# EAGLE board Schematic-1 (EAGLE 8.2.1)
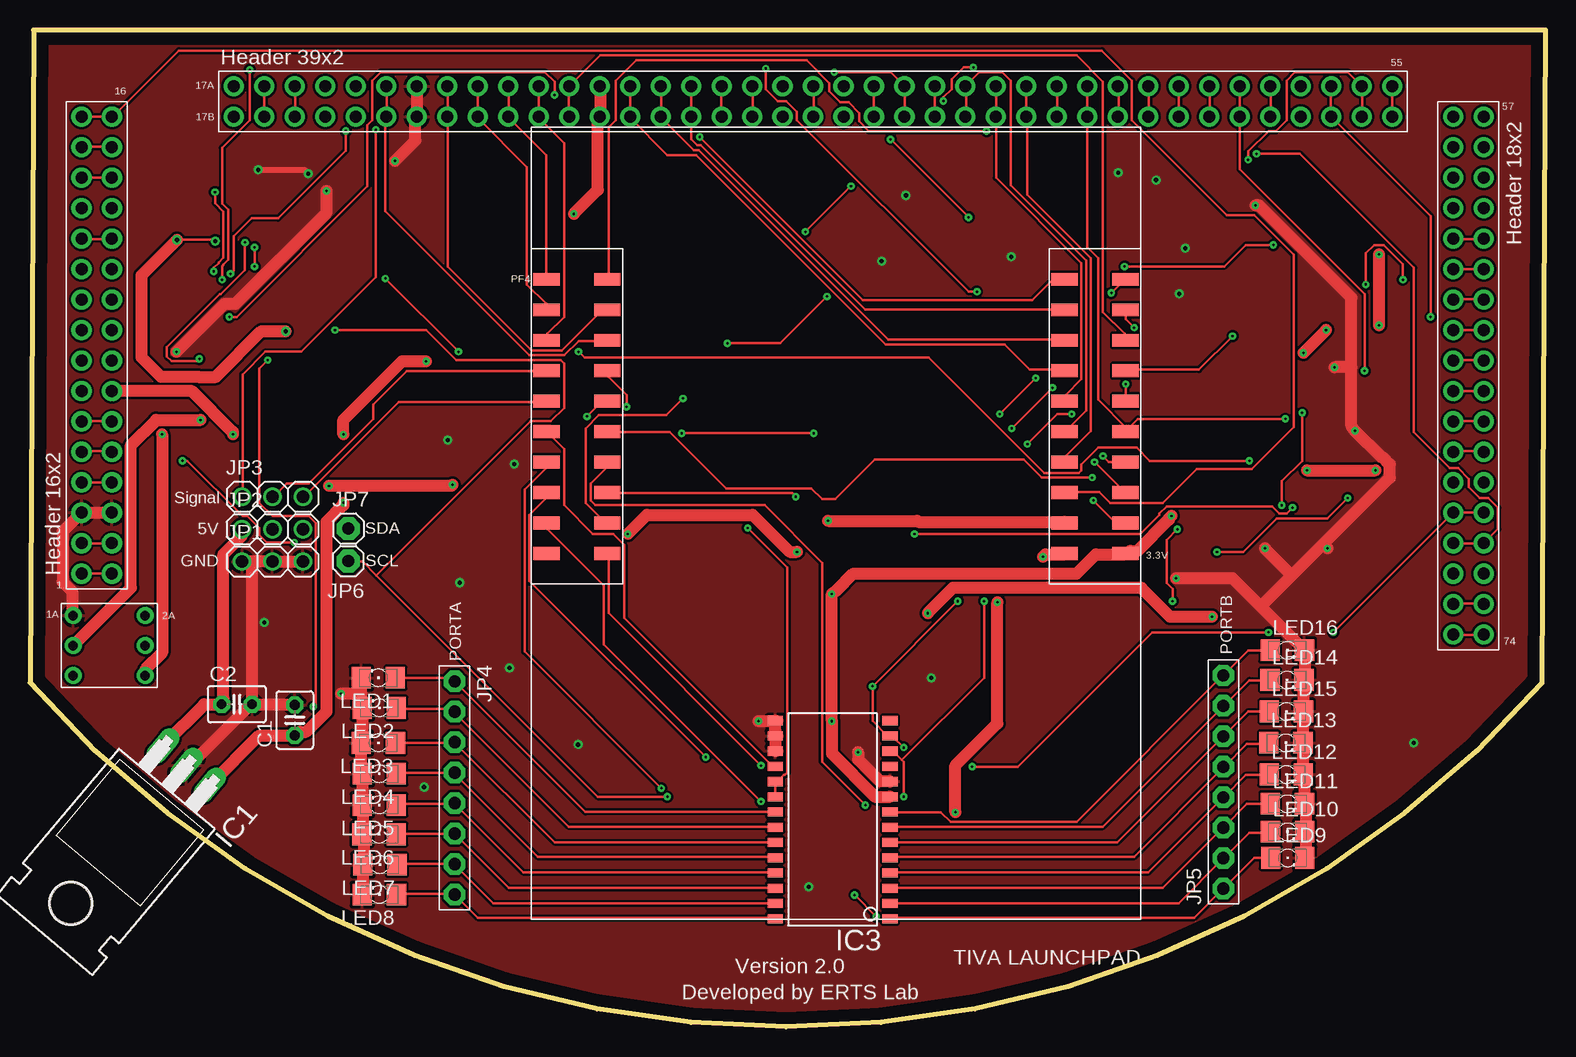
[diagram p0: board, top side]
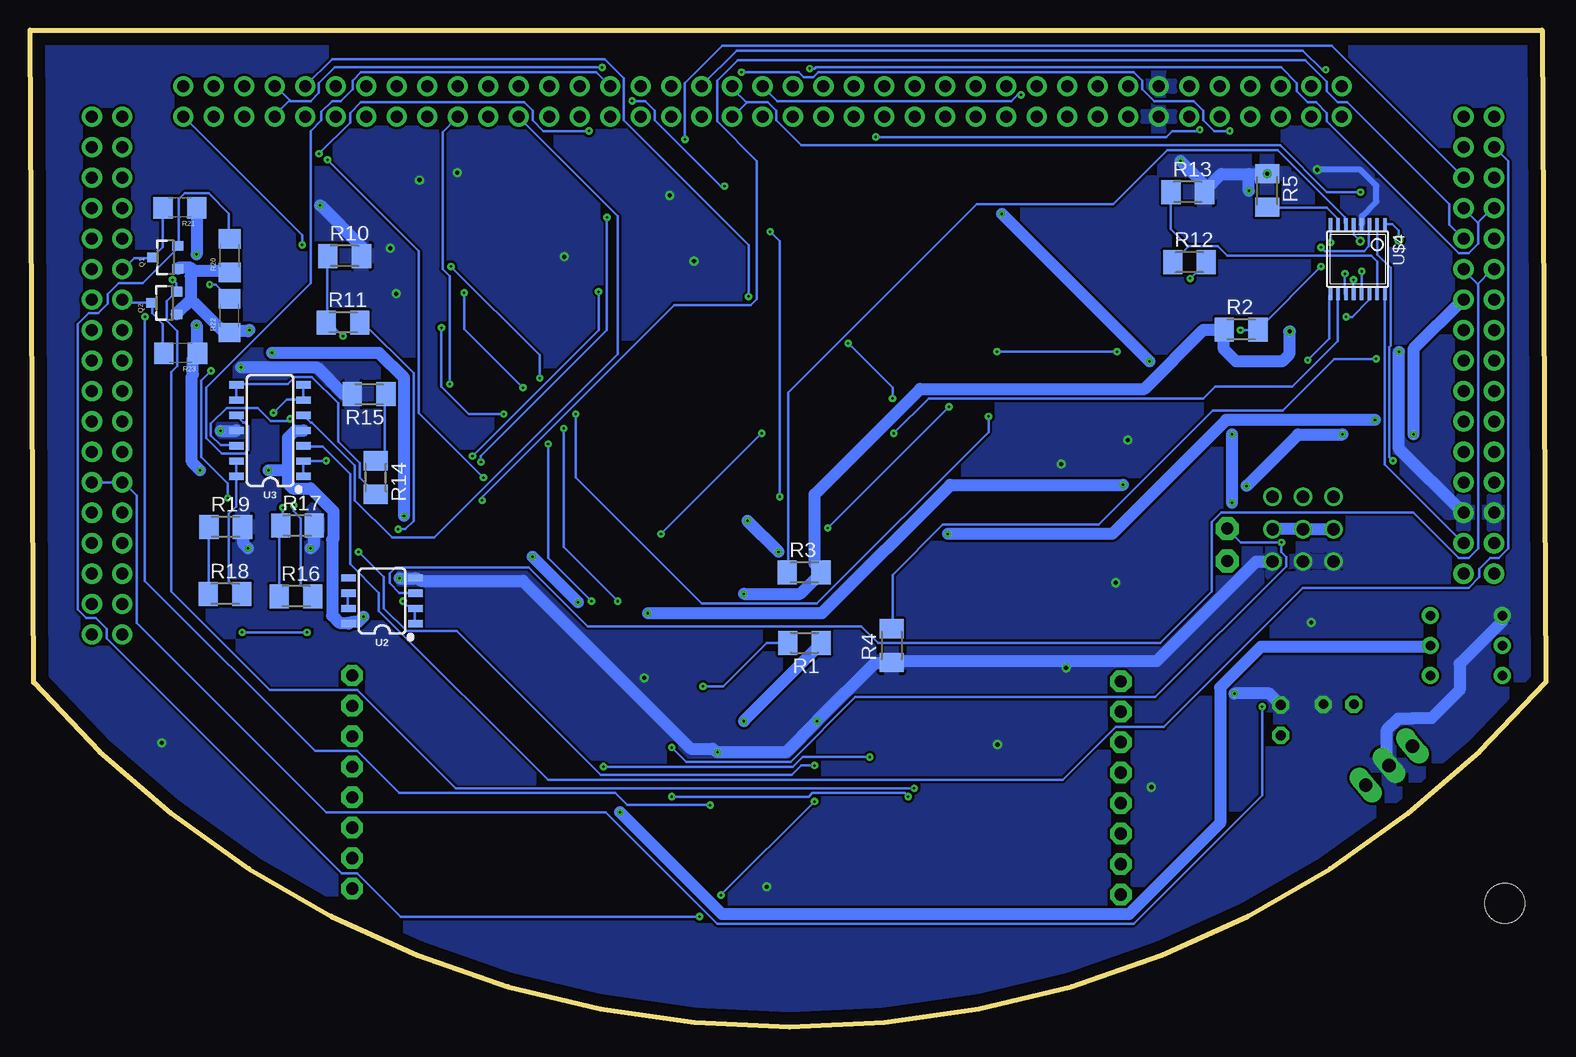
[diagram p1: board, bottom side, seen from below]

Size 126.3 x 83.12 mm. Coordinates in mm from the lower left corner, seen from the top.
Outline: 16.69,14.13 16.6,14.04
Outline: 16.67,13.9 16.67,13.9
Outline: 0.3,83.12 0,28.71 arc98 126,28.71 126.3,83.12 0.3,83.12
Copper layers (1*16): Top 0.035mm / dielectric 1.5mm / Bottom 0.035mm
Design rules "default *": minimum track width 6mil, minimum drill 0.2mm, track to track 6mil, track to pad 6mil, pad to pad 6mil, via to via 6mil, smd to smd 6mil, copper to edge 40mil, drill to drill 6mil, minimum pad ring 10mil, minimum via ring 8mil, stop-mask expansion 4mil, vias tented up to drill 0mil, thermal gap 10mil
Net classes: 0 default: width 0.2 mm, clearance 0.2 mm; 1 5V1: width 1 mm, clearance 0.2 mm; 2 3.3V: width 1 mm, clearance 0.2 mm; 3 5V-SERVO: width 1 mm, clearance 0.2 mm; 4 12V: width 1 mm, clearance 0.2 mm

## Footprints (pad centres in the part's own frame; a part is rotated, then mirrored left to right if it is on the bottom)
C025-030X050 = drill 0.813 pad 1.422 octagon: 1 -1.27,0; 2 1.27,0
TO220H = drill 1.118 long: 1 -2.54,-10.16; 2 0,-10.16; 3 2.54,-10.16 | hole 3.302: 0,4.826
SO28W = smd 0.762 x 1.27: 1 -7.62,-4.78; 2 -6.35,-4.78; 3 -5.08,-4.78; 4 -3.81,-4.78; 5 -2.54,-4.78; 6 -1.27,-4.78; 7 0,-4.78; 8 1.27,-4.78; 9 2.54,-4.78; 10 3.81,-4.78; 11 5.08,-4.78; 12 6.35,-4.78; 13 7.62,-4.78; 14 8.89,-4.78; 15 8.89,4.78; 16 7.62,4.78; 17 6.35,4.78; 18 5.08,4.78; 19 3.81,4.78; 20 2.54,4.78; 21 1.27,4.78; 22 0,4.78; 23 -1.27,4.78; 24 -2.54,4.78; 25 -3.81,4.78; 26 -5.08,4.78; 27 -6.35,4.78; 28 -7.62,4.78
1X03 = drill 1.016: 1 -2.54,0; 2 0,0; 3 2.54,0
1X08-BIG = drill 1.016 pad 1.778 octagon: 1 -8.89,0; 2 -6.35,0; 3 -3.81,0; 4 -1.27,0; 5 1.27,0; 6 3.81,0; 7 6.35,0; 8 8.89,0
1X01 = drill 1.016 pad 1.93 octagon: 1 0,0
1206 = smd 1.6 x 1.803: A -1.422,0; C 1.422,0
SOT23-3 = smd 0.8 x 0.9: 1 -0.95,-1; 2 0.95,-1; 3 0,1.1
M1206 = smd 1.6 x 2: 1 -1.4,0; 2 1.4,0
1206' = smd 1.6 x 1.8: 1 -1.4,0; 2 1.4,0
SO08 = smd 0.6 x 1.2: 1 -1.905,-2.8; 2 -0.635,-2.8; 3 0.635,-2.8; 4 1.905,-2.8; 5 1.905,2.8; 6 0.635,2.8; 7 -0.635,2.8; 8 -1.905,2.8
SO14 = smd 0.6 x 1.2: 1 -3.175,-2.8; 2 -1.905,-2.8; 3 -0.635,-2.8; 4 0.635,-2.8; 5 1.905,-2.8; 6 3.175,-2.8; 7 4.445,-2.8; 8 4.445,2.8; 9 3.175,2.8; 10 1.905,2.8; 11 0.635,2.8; 12 -0.635,2.8; 13 -1.905,2.8; 14 -3.175,2.8
DAUGHTERBOARD = drill 1 pad 1.676: 1 -22.86,-22.86; 1' -25.4,-22.86; 2 -22.86,-20.32; 2' -25.4,-20.32; 3 -22.86,-17.78; 3' -25.4,-17.78; 4 -22.86,-15.24; 4' -25.4,-15.24; 5 -22.86,-12.7; 5' -25.4,-12.7; 6 -22.86,-10.16; 6' -25.4,-10.16; 7 -22.86,-7.62; 7A -25.4,-7.62; 8 -22.86,-5.08; 8A -25.4,-5.08; 9 -22.86,-2.54; 9A -25.4,-2.54; 10 -22.86,0; 10A -25.4,0; 11 -22.86,2.54; 11' -25.4,2.54; 12 -22.86,5.08; 12' -25.4,5.08; 13 -22.86,7.62; 13' -25.4,7.62; 14 -22.86,10.16; 14' -25.4,10.16; 15 -22.86,12.7; 15' -25.4,12.7; 16 -22.86,15.24; 16' -25.4,15.24; 17A -12.7,17.78; 17B -12.7,15.24; 18 -10.16,15.24; 18' -10.16,17.78; 19 -7.62,15.24; 19' -7.62,17.78; 20 -5.08,15.24; 20A -5.08,17.78; 21 -2.54,15.24; 21A -2.54,17.78; 22 0,15.24; 22' 0,17.78; 23 2.54,15.24; 23' 2.54,17.78; 24 5.08,15.24; 24' 5.08,17.78; 25 7.62,15.24; 25' 7.62,17.78; 26 10.16,15.24; 26' 10.16,17.78; 27 12.7,15.24; 27' 12.7,17.78; 28 15.24,15.24; 28' 15.24,17.78; 29 17.78,15.24; 29' 17.78,17.78; 30 20.32,15.24; 30' 20.32,17.78; 31 22.86,15.24; 31' 22.86,17.78; 32 25.4,15.24; 32' 25.4,17.78; 33 27.94,15.24; 33' 27.94,17.78; 34 30.48,15.24; 34' 30.48,17.78; 35 33.02,15.24; 35A 33.02,17.78; 36 35.56,15.24; 36' 35.56,17.78; 37 38.1,15.24; 37' 38.1,17.78; 38 40.64,15.24; 38' 40.64,17.78; 39 43.18,15.24; 39' 43.18,17.78; 40 45.72,15.24; 40' 45.72,17.78; 41 48.26,15.24; 41' 48.26,17.78; 42 50.8,15.24; 42' 50.8,17.78; 43 53.34,15.24; 43' 53.34,17.78; 44 55.88,15.24; 44' 55.88,17.78; 45 58.42,15.24; 45' 58.42,17.78; 46 60.96,15.24; 46' 60.96,17.78; 47 63.5,15.24; 47' 63.5,17.78; 48 66.04,15.24; 48' 66.04,17.78; 49 68.58,15.24; 49' 68.58,17.78; 50 71.12,15.24; 50' 71.12,17.78; 51 73.66,15.24; 51' 73.66,17.78; 52 76.2,15.24; 52' 76.2,17.78; 53 78.74,15.24; 53' 78.74,17.78; 54 81.28,15.24; 54' 81.28,17.78; 55 83.82,15.24; 55' 83.82,17.78; 57 88.9,15.24; 57A 91.44,15.24; 58 88.9,12.7; 58A 91.44,12.7; 59 88.9,10.16; 59A 91.44,10.16; 60 88.9,7.62; 60A 91.44,7.62; 61 88.9,5.08; 61' 91.44,5.08; 62 88.9,2.54; 62' 91.44,2.54; 63 88.9,0; 63' 91.44,0; 64 88.9,-2.54; 64' 91.44,-2.54; 65 88.9,-5.08; 65' 91.44,-5.08; 66 88.9,-7.62; 66' 91.44,-7.62; 67 88.9,-10.16; 67' 91.44,-10.16; 68 88.9,-12.7; 68' 91.44,-12.7; 69 88.9,-15.24; 69' 91.44,-15.24; 70 88.9,-17.78; 70' 91.44,-17.78; 71 88.9,-20.32; 71' 91.44,-20.32; 72 88.9,-22.86; 72' 91.44,-22.86; 73 88.9,-25.4; 73' 91.44,-25.4; 74 88.9,-27.94; 74' 91.44,-27.94
TIVA_LAUNCHPAD = smd 2.184 x 1.067: 3.3V -16.51,10.16; GND -11.43,7.62; GND' 31.75,10.16; PA2 31.75,-12.7; PA3 31.75,-10.16; PA4 31.75,-7.62; PA5 -16.51,-7.62; PA6 -16.51,-10.16; PA7 -16.51,-12.7; PB0 -16.51,5.08; PB1 -16.51,2.54; PB2 31.75,7.62; PB3 26.67,5.08; PB4 -16.51,-5.08; PB5 -16.51,7.62; PB6 31.75,-5.08; PB7 31.75,-2.54; PC4 26.67,2.54; PC5 26.67,0; PC6 26.67,-2.54; PC7 26.67,-5.08; PD0 -11.43,5.08; PD1 -11.43,2.54; PD2 -11.43,0; PD3 -11.43,-2.54; PD6 26.67,-7.62; PD7 26.67,-10.16; PE0 31.75,5.08; PE1 -11.43,-5.08; PE2 -11.43,-7.62; PE3 -11.43,-10.16; PE4 -16.51,0; PE5 -16.51,-2.54; PF0 31.75,2.54; PF1 -11.43,-12.7; PF2 26.67,10.16; PF3 26.67,7.62; PF4 26.67,-12.7; RST 31.75,0; VBUS -11.43,10.16
SELF-LOCKING_SWITCH = drill 0.8 pad 1.422: 1A 0,0; 1B 0,-2.5; 1C 0,-5; 2A 6,0; 2B 6,-2.5; 2C 6,-5
ADC12_SD = smd 0.305 x 0.991: 1 -2.275,-2.918; 2 -1.625,-2.918; 3 -0.975,-2.918; 4 -0.325,-2.918; 5 0.325,-2.918; 6 0.975,-2.918; 7 1.625,-2.918; 8 2.275,-2.918; 9 2.275,2.918; 10 1.625,2.918; 11 0.975,2.918; 12 0.325,2.918; 13 -0.325,2.918; 14 -0.975,2.918; 15 -1.625,2.918; 16 -2.275,2.918

## Placement (x,y rotation side)
C1  100uF  [C025-030X050]  22.07,25.58 90 top
C2  10uF  [C025-030X050]  17.24,26.91 0 top
IC1  7805T  [TO220H]  6.51,14.02 140 top
IC3  MCP23017SO  [SO28W]  66.89,16.65 90 top
JP1  [1X03]  20.21,38.81 0 top
JP2  [1X03]  20.21,41.5 0 top
JP3  [1X03]  20.22,44.2 0 top
JP4  [1X08-BIG]  35.39,19.93 270 top
JP5  [1X08-BIG]  99.45,20.43 90 top
JP6  [1X01]  26.52,38.84 180 top
JP7  [1X01]  26.53,41.55 0 top
LED1  [1206]  29.03,29.11 180 top
LED2  [1206]  29.11,26.6 180 top
LED3  [1206]  29.03,23.69 180 top
LED4  [1206]  29.1,21.11 180 top
LED5  [1206]  29.11,18.51 180 top
LED6  [1206]  29.1,16.06 180 top
LED7  [1206]  29.15,13.53 180 top
LED8  [1206]  29.11,11.04 180 top
LED9  [1206]  104.81,14.1 0 top
LED10  [1206]  104.8,16.28 0 top
LED11  [1206]  104.79,18.62 0 top
LED12  [1206]  104.69,21.06 0 top
LED13  [1206]  104.66,23.7 0 top
LED14  [1206]  104.75,28.94 0 top
LED15  [1206]  104.7,26.31 0 top
LED16  [1206]  104.78,31.42 0 top
Q1  BSS138  [SOT23-3]  114.98,64.17 90 bottom
Q2  BSS138  [SOT23-3]  115.07,60.36 90 bottom
R1  4.7K  [M1206]  61.75,32.03 180 bottom
R2  4.7K  [M1206]  25.36,58.16 0 bottom
R3  4.7K  [M1206]  61.78,37.89 0 bottom
R4  1K  [M1206]  54.5,31.8 90 bottom
R5  1K  [M1206]  23.19,69.74 270 bottom
R10  33K  [M1206]  100.08,64.29 0 bottom
R11  22K  [M1206]  100.21,58.74 0 bottom
R12  22K  [M1206]  29.68,63.76 0 bottom
R13  33K  [M1206]  29.82,69.62 0 bottom
R14  22K  [M1206]  97.48,45.81 270 bottom
R15  33K  [M1206]  98.03,52.75 180 bottom
R16  22K  [M1206]  104.12,35.91 0 bottom
R17  33K  [M1206]  104.01,41.79 0 bottom
R18  22K  [M1206]  110.04,36.12 0 bottom
R19  33K  [M1206]  109.98,41.69 0 bottom
R20  10K  [1206']  109.65,64.31 90 bottom
R21  10K  [1206']  113.81,68.3 180 bottom
R22  10K  [1206']  109.67,59.31 90 bottom
R23  10K  [1206']  113.74,56.18 180 bottom
U2  LMV358  [SO08]  96.97,35.52 90 bottom
U3  LMV324  [SO14]  106.29,49.1 90 bottom
U$1  DAUGHTERBOARDDAUGHTERBOARD  [DAUGHTERBOARD]  29.69,60.66 0 top
U$2  TIVA_LAUNCHPADTIVA_LAUNCHPAD  [TIVA_LAUNCHPAD]  74.79,49.64 180 top
U$3  SELF-LOCKING_SWITCHSELF-LOCKING_SWITCH  [SELF-LOCKING_SWITCH]  3.6,34.3 0 top
U$4  ADC128D818  [ADC12_SD]  15.66,64.02 180 bottom

## Library data of the parts
C1 C2 IC1 IC3 JP1-JP7 LED1-LED16 R10-R19 = adafruit
Q1 Q2 R20-R23 = SparkFun
R1-R5 = rcl
U2 = SparkFun-IC-Amplifiers; PROD_ID: IC-09657
U3 = SparkFun-IC-Amplifiers; PROD_ID: IC-08227
U$1 = Daughterboard
U$2 = SMD_TIVA_LAUNCHPAD
U$3 = Switch_Self-locking
U$4 = ADC128D818

## Nets
2: U$1.2 U$1.2' U$4.16
3.3V [3.3V]: IC3.9 Q1.1 Q2.1 R1.1 R2.1 R3.2 R20.1 R22.1 U$2.3.3V U$4.1 U$4.5
5V1 [5V1]: R21.1 R23.1 U2.8 U3.4 U$1.7
5V2 [5V1]: U$1.10 U$3.2C
5V2' [5V1]: U$2.VBUS U$3.2B
5V-SERVO [5V-SERVO]: C2.1 IC1.3 JP2.1 JP2.2 JP2.3
11: U2.3 U$1.11 U$1.11'
12: U$1.12 U$1.12' U$2.PB5
12V [12V]: C1.1 IC1.1 U$1.29 U$1.29'
13: U$1.13 U$1.13' U$2.PB1
14: U$1.14 U$1.14' U$2.PB0
15: U3.3 U$1.15 U$1.15'
16: U$1.16 U$1.16' U$2.PD0
22: U$1.22 U$1.22' U$2.PD6
24: U$1.24 U$1.24' U$2.PD7
25: U$1.25 U$1.25' U$2.PA3
26: U$1.26 U$1.26' U$2.PA2
27: U$1.27 U$1.27' U$2.PA4
28: U$1.28 U$1.28' U$2.PA5
30: U$1.30 U$1.30' U$2.PE1
31: U$1.31 U$1.31' U$2.PE2
32: U$1.32 U$1.32' U$2.PE3
36: U$1.36 U$1.36' U$4.14
37: U$1.37 U$1.37' U$4.13
38: U$1.38 U$1.38' U$4.12
39: U$1.39 U$1.39' U$4.11
41: U3.10 U$1.41 U$1.41' U$2.PD2
42: U$1.42 U$1.42' U$2.PD3
43: U$1.43 U$1.43' U$2.PD1
44: U3.5 U$1.44 U$1.44'
45: U3.12 U$1.45 U$1.45' U$2.PE4
46: U$1.46 U$1.46' U$2.PE5
50: U$1.50 U$1.50' U$2.PF2
51: U$1.51 U$1.51' U$2.PF3
52: U$1.52 U$1.52' U$2.PB3
53: U$1.53 U$1.53' U$2.PC4
54: U$1.54 U$1.54' U$2.PC5
55: U$1.55 U$1.55' U$2.PC6
61: U$1.61 U$1.61'
62: Q1.3 R21.2 U$1.62 U$1.62'
63: Q2.3 R23.2 U$1.63 U$1.63'
69: U$1.69 U$1.69' U$4.9
70: U$1.70 U$1.70' U$2.PE0
71: U$1.71 U$1.71' U$2.PF4
EX1: R12.1 R13.1 U$4.15
EX6: R16.1 R17.1 U$4.10
GND [5V1]: C1.2 C2.2 IC1.2 IC3.10 IC3.15 IC3.16 IC3.17 JP1.1 JP1.2 JP1.3 LED1.C LED2.C LED3.C LED4.C LED5.C LED6.C LED7.C LED8.C LED9.C LED10.C LED11.C LED12.C LED13.C LED14.C LED15.C LED16.C R4.1 R5.1 R10.2 R13.2 R15.2 R17.2 R19.2 U2.4 U3.11 U$1.3 U$1.3' U$1.23 U$1.23' U$3.1A U$4.4
GND' [5V1]: U$2.GND U$3.1B
N1: R11.2 U2.1 U2.2
N2: R12.2 U3.1 U3.2
N3: R14.2 U3.8 U3.9
N4: R16.2 U3.6 U3.7
N5: R18.2 U3.13 U3.14
N$1: U$1.1 U$1.1'
N$2: U2.6 U2.7
N$3: IC3.21 JP4.1 LED1.A
N$4: U$1.4 U$1.4'
N$5: U$1.5 U$1.5'
N$6: U$1.6 U$1.6'
N$7: IC3.23 JP4.3 LED3.A
N$8: IC3.24 JP4.4 LED4.A
N$9: IC3.22 JP4.2 LED2.A
N$10: IC3.25 JP4.5 LED5.A
N$11: IC3.26 JP4.6 LED6.A
N$12: IC3.27 JP4.7 LED7.A
N$13: U$1.18 U$1.18'
N$14: U$1.19 U$1.19'
N$15: IC3.28 JP4.8 LED8.A
N$17: R3.1 U$4.6
N$18: R5.2 U$4.7
N$19: R4.2 U$4.8
N$20: IC3.1 JP5.1 LED9.A
N$21: IC3.2 JP5.2 LED10.A
N$22: IC3.3 JP5.3 LED11.A
N$23: IC3.4 JP5.4 LED12.A
N$24: IC3.5 JP5.5 LED13.A
N$25: IC3.6 JP5.6 LED15.A
N$26: U$1.33 U$1.33'
N$27: U$1.34 U$1.34'
N$28: IC3.7 JP5.7 LED14.A
N$29: IC3.8 JP5.8 LED16.A
N$33: U$1.40 U$1.40'
N$39: U$1.47 U$1.47'
N$40: U$1.48 U$1.48'
N$41: U$1.49 U$1.49'
N$51: U$1.64 U$1.64'
N$52: U$1.65 U$1.65'
N$53: U$1.66 U$1.66'
N$54: U$1.67 U$1.67'
N$55: U$1.68 U$1.68'
N$59: U$1.73 U$1.73'
N$60: U$1.74 U$1.74'
NC: U2.5
PB2: Q1.2 R20.2 U$2.PB2
PB4: R10.1 R11.1 U$2.PB4
PB6: JP3.2 U$2.PB6
PB7: JP3.3 U$2.PB7
PC7: IC3.19 IC3.20 U$2.PC7
PD2: R14.1 R15.1
PE4: R18.1 R19.1
PF0: Q2.2 R22.2 U$2.PF0
PF1: JP3.1 U$2.PF1
RST: IC3.18 U$2.RST
SCL: IC3.12 JP6.1 R2.2 U$2.PA6 U$4.3
SDA: IC3.13 JP7.1 R1.2 U$2.PA7 U$4.2

## Tracks (layer width: path | path; a pad name or v marks a point on that pad's centre or on a via)
2
  Top 0.2: U$1.2' 4.31,40.3 6.81,40.3 U$1.2
  Bottom 0.2: U$4.16 13.41,61 13.41,46.9 6.91,40.4 U$1.2
3.3V  (via drill 0.2, 0.35)
  Top 0.2: v12.25,65.62 12.26,65.64 15.32,65.64 v15.43,65.53
  Top 1: IC3.9 71.61,19.2 70.41,19.2 66.81,22.8 v66.81,25.5 v66.81,36.1 67.21,36.4 68.61,37.8 87.21,37.8 88.81,39.4 91.21,39.4 U$2.3.3V 91.71,39.7 92.31,39.7 94.91,42.3 94.91,42.4 v95.11,42.6 | v106.11,56.2 v108.01,58.1
  Top 1.016: v12.25,65.62 9.28,62.65 9.28,55.84 10.9,54.21 14.01,54.21 14.03,54.19 15.48,54.19 19.29,58 v21.31,58
  Bottom 0.2: U$4.5 15.98,66.17 15.98,66.07 v15.43,65.53 | v12.25,65.62 12.25,66.41 12.77,66.93 U$4.1
  Bottom 1: 112.61,63 112.91,63.3 113.91,63.3 Q1.1 | 112.61,63 109.71,63 R20.1 | 112.91,60.6 114.01,59.5 Q2.1 | 112.91,60.6 112.91,62.6 112.61,63 | 112.91,60.6 112.51,60.3 110.21,58 109.71,58 R22.1 109.21,58 108.11,58 v108.01,58.1 | v66.81,25.5 60.31,32 R1.1 | v66.81,36.1 62.11,36.1 60.41,37.8 R3.2 60.61,38.3 60.91,38.6 60.91,44.4 52.11,53.2 33.41,53.2 28.51,58.1 26.81,58.1 R2.1 | v106.11,56.2 97.21,56.2 95.11,54.1 v95.11,42.6
  Bottom 1.016: v21.31,58 21.36,57.94 21.36,56.08 21.94,55.5 25.79,55.5 26.81,56.52 26.81,58.1
5V1  (via drill 0.2)
  Top 1: v112.41,64.4 v112.41,58.5 | v16.91,49.4 16.91,49.6 13.51,53 6.91,53 U$1.7 | v24.91,45.1 35.11,45.1 v35.21,45.2 | v74.81,34.5 76.91,36.6 92.61,36.6 95.01,34.2 v98.51,34.2 | v106.41,46.4 v112.11,46.4
  Bottom 1: v112.41,58.5 112.41,56.2 R23.1 112.71,55.8 112.71,54.4 112.81,54.3 112.81,47.1 v112.11,46.4 | v112.41,64.4 R21.1 | 104.81,46.4 104.81,49.1 104.21,49.7 103.51,49.7 U3.4 | 104.81,46.4 104.81,45.3 104.41,44.9 102.91,44.9 101.01,43 101.01,40.7 101.11,40.6 101.11,34.3 100.51,33.7 99.81,33.7 U2.8 99.31,33.8 98.91,33.8 v98.51,34.2 | v16.91,49.4 20.61,49.4 v24.91,45.1 | v35.21,45.2 49.61,45.2 60.31,34.5 v74.81,34.5 | 104.81,46.4 v106.41,46.4
5V2  (via drill 0.2)
  Top 1: v11.01,49.4 11.01,31.2 9.61,29.8 U$3.2C
  Bottom 1: v11.01,49.4 11.01,56.5 6.91,60.6 U$1.10
5V2'  (via drill 0.2)
  Top 1: v84.41,39.2 84.61,39.4 86.21,39.4 U$2.VBUS | v80.61,35.4 80.61,25.3 77.11,21.8 v77.11,17.9
  Bottom 1: v80.61,35.4 v84.41,39.2 | v77.11,17.9 68.61,9.4 34.71,9.4 27.11,17 27.11,28.3 23.71,31.7 9.61,31.7 U$3.2B
5V-SERVO
  Top 1: IC1.3 11.11,23.5 14.51,26.9 15.91,26.9 C2.1 16.11,27.4 16.11,39.4 17.61,40.9 17.61,41.4 JP2.1
  Bottom 1: JP2.1 17.71,41.5 20.11,41.5 JP2.2 20.61,41.5 22.71,41.5 JP2.3
11
  Bottom 0.2: 5.66,61.95 6.81,63.1 U$1.11 | 5.66,61.95 5.61,61.9 5.61,39.9 6.41,39.1 7.21,39.1 11.01,42.9 27.01,42.9 27.81,42.1 27.81,36.3 32.11,32 55.61,32 57.01,33.4 79.81,33.4 84.71,38.3 95.81,38.3 96.31,37.8 96.31,37 95.51,36.2 94.21,36.2 U2.3 | 5.66,61.95 4.51,63.1 4.31,63.1 U$1.11'
12  (via drill 0.2)
  Top 0.2: v88.61,43.9 90.41,42.1 91.21,42.1 U$2.PB5 | U$1.12' 4.31,65.7 6.81,65.7 U$1.12
  Bottom 0.2: v88.61,43.9 88.61,44.2 72.61,60.2 66.21,60.2 65.71,60.7 65.71,72.2 69.01,75.5 69.01,78.9 67.31,80.6 20.01,80.6 18.21,78.8 18.21,78 17.31,77.1 16.51,77.1 8.01,68.6 8.01,66.9 6.91,65.8 U$1.12
12V  (via drill 0.2)
  Top 1: U$1.29' 47.51,78.4 47.51,75.9 U$1.29 47.31,75.4 47.31,69.8 v45.31,67.8 | IC1.1 15.01,20.2 19.11,24.3 22.01,24.3 C1.1 22.51,24.6 23.01,24.6 24.71,26.3 24.71,42.1 26.11,43.5 v26.11,43.7 | v33.01,55.5 31.01,55.5 26.11,50.6 v26.11,49.4
  Bottom 1: v33.01,55.5 v45.31,67.8 | v26.11,43.7 v26.11,49.4
13  (via drill 0.2)
  Top 0.2: v89.41,47.6 89.91,47.1 91.21,47.1 U$2.PB1 | v78.91,61.3 78.21,61.3 63.91,75.6 63.91,76.3 63.01,77.2 62.31,77.2 61.31,78.2 v61.31,79.9
  Bottom 0.2: v89.41,47.6 78.91,58.1 v78.91,61.3 | v61.31,79.9 60.91,79.9 60.81,80 22.01,80 20.71,78.7 20.71,78 19.81,77.1 19.11,77.1 18.21,76.2 18.21,75.5 7.21,64.5 6.41,64.5 5.61,65.3 5.61,67 5.66,67.05 | 5.66,67.05 6.81,68.2 U$1.13 | 5.66,67.05 4.51,68.2 4.31,68.2 U$1.13'
14  (via drill 0.2)
  Top 0.2: v88.71,47.1 91.21,44.6 U$2.PB0 | v71.71,74 v78.21,67.5 | U$1.14' 4.31,70.8 6.81,70.8 U$1.14
  Bottom 0.2: v88.71,47.1 88.71,47.6 78.21,58.1 v78.21,67.5 | v71.71,74 71.71,78.7 68.61,81.8 17.81,81.8 6.91,70.9 U$1.14
15
  Top 0.2: U$1.15 6.81,73.4 4.31,73.4 U$1.15'
  Bottom 0.2: U3.3 103.41,48.4 101.91,48.4 99.61,46.1 99.61,38.6 97.21,36.2 97.21,34.7 83.11,20.6 40.21,20.6 35.81,25 31.81,25 20.21,36.6 6.41,36.6 5.51,37.5 5.51,38.2 4.61,39.1 3.91,39.1 3.11,39.9 3.11,72.2 4.21,73.3 U$1.15'
16
  Top 0.2: U$2.PD0 86.31,44.6 89.11,44.6 90.01,43.7 94.41,43.7 97.21,46.5 101.81,46.5 105.31,50 105.31,64.4 102.01,67.7 99.71,67.7 91.81,75.6 91.81,78.9 89.31,81.4 12.41,81.4 6.91,75.9 U$1.16 6.81,75.9 4.31,75.9 U$1.16'
22
  Top 0.2: U$2.PD6 48.11,57.2 45.71,57.2 44.51,56 41.61,56 29.61,68 29.61,75.8 U$1.22 29.71,75.9 29.71,78.4 U$1.22'
24
  Top 0.2: U$2.PD7 48.11,59.7 47.61,59.7 44.31,56.4 41.81,56.4 34.81,63.4 34.81,75.8 U$1.24 34.81,75.9 34.81,78.4 U$1.24'
25
  Top 0.2: U$2.PA3 43.01,59.8 43.01,60.3 41.41,61.9 41.41,71.7 37.31,75.8 U$1.25 37.31,78.4 U$1.25'
26
  Top 0.2: U$2.PA2 43.01,62.4 43.01,72.7 39.91,75.8 U$1.26 39.91,75.9 39.91,78.4 U$1.26'
27
  Top 0.2: U$2.PA4 43.11,57.3 43.11,57.8 44.51,59.2 44.51,73.7 42.41,75.8 U$1.27 42.41,75.9 42.41,78.4 U$1.27'
28
  Top 0.2: U$2.PA5 91.21,57.3 91.21,57.8 89.41,59.6 89.41,78.8 87.21,81 47.51,81 45.01,78.5 U$1.28' 44.91,78.4 44.91,75.9 U$1.28
30
  Top 0.2: U$2.PE1 86.21,54.8 83.31,54.8 81.21,56.9 71.31,56.9 55.51,72.7 53.11,72.7 50.01,75.8 U$1.30 50.01,78.4 U$1.30'
31
  Top 0.2: U$2.PE2 86.21,57.3 71.51,57.3 55.71,73.1 55.31,73.1 52.61,75.8 U$1.31 52.61,75.9 52.61,78.4 U$1.31'
32
  Top 0.2: U$2.PE3 69.61,59.8 55.91,73.5 55.61,73.5 55.11,74 55.11,75.8 U$1.32 55.11,75.9 55.11,78.4 U$1.32'
36  (via drill 0.2)
  Top 0.2: v16.61,59.2 17.21,59.2 28.11,70.1 28.11,75.2 28.51,75.6 28.51,78.9 29.21,79.6 42.91,79.6 43.71,78.8 v43.71,77.7 | U$1.36 65.31,75.9 65.31,78.4 U$1.36'
  Bottom 0.2: v16.61,59.2 16.11,59.2 14.71,60.6 14.71,61 U$4.14 | v43.71,77.7 44.01,77.7 44.51,77.2 64.01,77.2 65.21,78.4 U$1.36'
37  (via drill 0.2)
  Top 0.2: v15.31,63 15.31,63.3 15.71,63.7 15.71,63.73 16.12,64.15 16.12,68 15.42,68.7 v15.42,69.6
  Bottom 0.2: v15.31,63 15.31,61.1 U$4.13 | 22.11,73.5 62.01,73.5 64.11,75.6 64.11,76.4 64.81,77.1 66.51,77.1 66.56,77.05 | 66.56,77.05 67.71,75.9 U$1.37 | 66.56,77.05 67.71,78.2 67.71,78.4 U$1.37' | 22.11,73.5 22.11,73.47 | v15.42,69.6 18.21,69.6 22.11,73.5
38  (via drill 0.2)
  Top 0.2: v18.31,79.8 18.31,75.6 16.01,73.3 16.01,69.86 16.02,69.85 16.02,68.67 16.52,68.16 16.52,63.98 16.11,63.57 16.11,63.54 16.01,63.44 v16.01,62.3 16.11,62.4 | U$1.38 70.31,75.9 70.31,78.4 U$1.38'
  Bottom 0.2: v16.01,62.3 16.01,61.1 U$4.12 | v18.31,79.8 18.61,79.8 20.21,81.4 67.41,81.4 70.31,78.5 U$1.38'
39  (via drill 0.2)
  Top 0.2: v67.01,79.6 71.71,79.6 72.81,78.5 U$1.39' 72.91,78.4 72.91,75.9 U$1.39 | v26.31,74.7 26.31,73.06 20.67,67.42 18.46,67.42 16.97,65.92 16.97,63.06 v16.71,62.8
  Bottom 0.2: v16.71,62.8 16.71,61.1 U$4.11 | v26.31,74.7 27.61,74.7 28.51,75.6 28.51,76.4 29.31,77.2 32.61,77.2 33.61,78.2 33.61,78.9 34.31,79.6 60.61,79.6 61.01,79.2 61.81,79.2 62.21,79.6 v67.01,79.6
41
  Top 0.2: U$2.PD2 86.31,49.7 88.01,51.4 88.01,63.9 81.71,70.2 81.71,78.9 81.01,79.6 79.11,79.6 78.01,78.5 U$1.41' 78.01,78.4 78.01,75.9 U$1.41
  Bottom 0.2: U3.10 109.01,50.9 108.51,50.4 108.41,50.4 108.11,50.1 108.11,48.1 108.41,47.8 110.31,47.8 111.61,49.1 111.61,53.3 102.91,62 102.91,74.7 102.01,75.6 102.01,76.3 101.11,77.2 100.41,77.2 99.41,78.2 99.41,78.9 98.71,79.6 79.11,79.6 78.01,78.5 U$1.41'
42
  Top 0.2: U$2.PD3 86.31,52.2 86.31,52.7 87.61,54 87.61,63.7 80.51,70.8 80.51,75.8 U$1.42 80.51,75.9 80.51,78.4 U$1.42'
43
  Top 0.2: U$2.PD1 86.31,47.1 86.31,47.6 88.41,49.7 88.41,64.1 83.11,69.4 83.11,75.8 U$1.43 83.01,75.9 83.01,78.4 U$1.43'
44
  Top 0.2: U$1.44' 85.61,78.4 85.61,75.9 U$1.44
  Bottom 0.2: U3.5 103.41,50.9 102.91,50.4 102.81,50.4 99.21,46.8 99.21,43.9 96.11,40.8 92.61,40.8 77.31,56.1 77.31,67.6 85.51,75.8 U$1.44
45  (via drill 0.2)
  Top 0.2: U$1.45' 88.11,78.4 U$1.45 88.11,75.8 88.11,65 89.01,64.1 89.01,52.3 91.41,49.9 U$2.PE4 91.31,49.7 92.31,50.7 v104.61,50.7
  Bottom 0.2: v104.61,50.7 104.81,50.5 106.21,50.5 107.31,51.6 109.91,51.6 111.21,50.3 111.21,49.3 110.41,48.5 109.11,48.5 U3.12
46  (via drill 0.2)
  Top 0.2: v91.31,53.6 91.31,52.2 U$2.PE5 | U$1.46' 90.71,78.4 90.71,75.9 U$1.46
  Bottom 0.2: v91.31,53.6 91.31,62.6 91.91,63.2 91.91,74.6 90.71,75.8 U$1.46
50  (via drill 0.2)
  Top 0.2: v60.91,21.8 48.21,34.5 48.21,39.4 U$2.PF2 | v98.91,39.6 101.11,39.6 103.91,42.4 108.11,42.4 v109.81,44.1 | v111.21,54.7 111.21,61.1 100.81,71.5 100.81,75.8 U$1.50 100.81,78.4 U$1.50'
  Bottom 0.2: v60.91,21.8 62.01,21.8 62.81,21 78.71,21 90.71,33 94.91,33 96.81,34.9 96.81,37.5 v98.91,39.6 | v109.81,44.1 109.81,45.3 112.01,47.5 112.01,53.9 v111.21,54.7
51  (via drill 0.2)
  Top 0.2: v54.41,52.4 53.01,51 47.41,51 46.31,49.9 46.31,43.7 47.91,42.1 48.11,42.1 U$2.PF3 | v58.11,57 62.51,57 v66.41,60.9 | U$1.51 103.41,75.9 103.41,78.4 U$1.51'
  Bottom 0.2: v54.41,52.4 54.41,53.3 v58.11,57 | v66.41,60.9 66.41,65.2 76.81,75.6 76.81,79.1 78.41,80.7 101.11,80.7 103.31,78.5 U$1.51'
52  (via drill 0.2)
  Top 0.2: v63.81,44.2 63.51,44.5 48.21,44.5 U$2.PB3 | v68.41,70.1 v64.61,66.3 | v76.11,77.2 76.11,77.5 76.81,78.2 76.81,79 77.81,80 v78.61,80
  Bottom 0.2: v63.81,44.2 63.81,65.5 v64.61,66.3 | v68.41,70.1 68.71,70.1 74.21,75.6 74.21,76.4 75.01,77.2 v76.11,77.2 | v78.61,80 100.91,80 102.21,78.7 102.21,77.9 102.91,77.2 104.61,77.2 104.66,77.25 | 104.66,77.25 105.81,78.4 U$1.52' | 104.66,77.25 105.81,76.1 105.81,75.9 U$1.52
53  (via drill 0.2)
  Top 0.2: v69.61,18.5 66.01,22.1 66.01,38.7 61.21,43.5 47.11,43.5 46.71,43.9 46.71,45.3 48.11,46.7 48.11,47 U$2.PC4 | v116.71,59.2 116.71,67.6 108.51,75.8 U$1.53 108.41,75.9 108.41,78.4 U$1.53'
  Bottom 0.2: v69.61,18.5 76.51,18.5 77.51,19.5 95.51,19.5 99.01,23 102.51,23 116.71,37.2 v116.71,59.2
54  (via drill 0.2)
  Top 0.2: v88.51,45.8 84.31,45.8 82.81,47.3 70.41,47.3 67.11,44 66.01,44 65.11,44.9 58.01,44.9 53.31,49.6 48.21,49.6 U$2.PC5 | v101.51,72.3 101.51,73 103.21,74.7 103.81,74.7 104.71,75.6 104.71,78.9 105.41,79.6 109.81,79.6 110.91,78.5 U$1.54' 111.01,78.4 111.01,75.9 U$1.54
  Bottom 0.2: v88.51,45.8 93.91,51.2 93.91,64.7 v101.51,72.3
55  (via drill 0.2)
  Top 0.2: v46.41,50.9 47.61,52.1 48.11,52.1 U$2.PC6 | v83.81,54.1 v80.81,51.1 | v91.21,63.4 99.51,63.4 101.31,65.2 v103.61,65.2 | U$1.55' 113.51,78.4 U$1.55
  Bottom 0.2: v46.41,50.9 46.41,49.6 60.71,35.3 70.31,35.3 80.81,45.8 v80.81,51.1 | v83.81,54.1 83.81,56 v91.21,63.4 | v103.61,65.2 103.61,66 113.41,75.8 U$1.55
61
  Top 0.2: U$1.61 118.61,65.7 121.11,65.7 U$1.61'
62
  Top 0.2: U$1.62' 121.11,63.2 118.61,63.2 U$1.62
  Bottom 0.2: U$1.62 118.51,63.2 117.61,64.1 116.11,64.1 Q1.3 116.01,64.2 115.21,65 R21.2
63
  Top 0.2: U$1.63' 121.11,60.7 118.61,60.7 U$1.63
  Bottom 0.2: U$1.63 118.51,60.6 118.31,60.4 116.21,60.4 Q2.3 116.11,60.3 116.11,59.5 115.21,58.6 115.21,56.2 R23.2
69  (via drill 0.2)
  Top 0.2: v23.61,26.7 23.81,26.9 23.81,42 23.21,42.6 20.21,42.6 19.11,43.7 19.11,54.9 v19.81,55.6
  Bottom 0.2: v19.81,55.6 18.01,57.4 18.01,61 U$4.9 | v23.61,26.7 23.61,19.3 34.31,8.6 69.01,8.6 78.31,17.9 101.61,17.9 117.41,33.7 117.41,44.3 118.51,45.4 U$1.69 118.61,45.4 121.11,45.4 U$1.69'
70  (via drill 0.2)
  Top 0.2: v56.31,22.5 41.61,37.2 41.61,42.7 43.01,44.1 43.01,44.5 U$2.PE0 | v78.51,21.7 82.31,21.7 93.51,32.9 v103.21,32.9 | v108.61,32.9 118.51,42.8 U$1.70 118.61,42.9 121.11,42.9 U$1.70'
  Bottom 0.2: v56.31,22.5 61.91,22.5 62.71,21.7 v78.51,21.7 | v108.61,32.9 v103.21,32.9
71  (via drill 0.2)
  Top 0.2: v79.71,74.7 69.91,74.7 69.11,75.5 69.11,76.2 68.21,77.1 67.51,77.1 66.61,78 66.61,78.7 64.71,80.6 50.51,80.6 48.81,78.9 48.81,75.6 48.21,75 48.21,62.4 U$2.PF4 | v102.21,72.8 105.81,72.8 115.31,63.3 115.31,49.6 118.31,46.6 119.01,46.6 119.91,45.7 119.91,45 120.81,44.1 121.51,44.1 122.31,43.3 122.31,41.5 121.21,40.4 U$1.71' 121.11,40.3 118.61,40.3 U$1.71
  Bottom 0.2: v79.71,74.7 83.51,74.7 84.41,75.6 84.41,76.4 85.11,77.1 98.71,77.1 99.61,76.2 99.61,75.4 v102.21,72.8
EX1
  Bottom 0.2: 29.76,65.05 31.01,63.8 R12.1 | 29.76,65.05 29.71,65.1 27.31,65.1 26.51,64.3 14.51,64.3 14.01,63.8 14.01,61.1 U$4.15 | 29.76,65.05 31.21,66.5 31.21,69.6 R13.1
EX6  (via drill 0.2)
  Top 0.2: v65.31,49.5 v54.31,49.5 | v73.71,41.1 92.51,41.1 94.11,42.7 94.11,42.8 94.71,43.4 103.51,43.4 104.11,42.8 104.71,42.8 v105.21,43.3
  Bottom 0.2: v54.31,49.5 51.41,52.4 28.51,52.4 27.51,53.4 21.11,53.4 17.31,57.2 17.31,61 U$4.10 | v73.71,41.1 v65.31,49.5 | v105.21,43.3 105.21,41.9 105.31,41.8 R17.1 105.41,41.7 105.51,41.6 105.51,36 R16.1
GND  (via drill 0.2, 0.35)
  Top 0.508: v19.03,71.46 22.87,71.46 R5.1
  Top 1: U$1.23' 32.21,78.4 32.21,75.9 U$1.23 32.11,75.4 32.11,73.9 v30.41,72.2 | LED8.C 27.71,11.1 27.71,13.5 LED7.C 27.81,14 27.81,15.6 LED6.C 27.71,16.1 27.71,18.5 LED5.C 27.71,19 27.71,21.1 LED4.C 27.61,21.6 27.61,23.6 LED3.C 27.71,24.1 27.71,26.5 LED2.C 27.61,27 27.61,27.8 | 27.61,27.8 LED1.C | U$3.1A 3.51,34.3 3.51,36.3 2.71,37.1 2.71,41.3 4.21,42.8 U$1.3' 4.71,42.9 6.81,42.9 U$1.3 | 18.51,38.8 20.11,38.8 JP1.2 20.61,38.8 22.71,38.8 JP1.3 | 18.51,38.8 17.71,38.8 JP1.1 | C1.2 22.01,26.9 C2.2 | IC1.2 13.11,21.8 13.31,21.8 18.11,26.6 C2.2 | 18.51,38.8 18.51,27.4 C2.2 | v25.91,27.8 27.61,27.8 | v24.71,69.7 24.71,67.9 17.11,60.3 16.21,60.3 v12.21,56.3 | IC3.17 62.11,24.2 IC3.16 62.11,24.7 62.11,25.5 IC3.15 61.61,25.5 v60.71,25.5 | v69.01,22.9 69.01,22.3 70.81,20.5 71.61,20.5 IC3.10 | LED9.C 106.31,14.2 106.31,15.8 LED10.C 106.31,16.3 106.31,18.2 LED11.C 106.21,18.7 106.21,21 LED12.C 106.11,21.5 106.11,23.6 LED13.C 106.11,24.2 LED15.C 106.11,26.8 106.11,28.5 LED14.C 106.21,29 106.21,31 LED16.C 106.11,31.5 102.56,35.05 | v95.51,37.4 100.21,37.4 102.56,35.05 | 102.56,35.05 105.16,37.65 | 105.16,37.65 107.76,40.25 | 107.76,40.25 113.31,45.8 113.31,46.9 112.71,47.5 112.61,47.5 v110.41,49.7 110.11,50.1 110.11,55 | v108.11,39.9 107.76,40.25 | 105.16,37.65 v102.91,39.9 | v102.11,68.5 102.41,68.5 110.11,60.8 110.11,55 | 110.11,55 v108.71,55
  Bottom 0.508: U$4.4 15.29,66.98 15.29,67.62 14.09,68.82 14.09,70.12 15.43,71.46 v19.03,71.46
  Bottom 1: 24.71,71.1 27.01,71.1 28.41,69.7 R13.2 28.51,70.3 v30.41,72.2 | 24.71,71.1 23.21,71.1 R5.1 | 3.61,33.8 3.61,34.2 U$3.1A | 11.11,25.7 12.31,25.7 13.21,24.8 13.21,21.9 13.11,21.8 IC1.2 | v25.91,27.8 23.01,27.8 22.11,26.9 C1.2 | v24.71,69.7 24.71,71.1 | v12.21,56.3 12.21,48.2 6.91,42.9 U$1.3 | v95.51,37.4 94.21,37.4 U2.4 93.71,37.2 85.21,37.2 71.21,23.2 69.41,23.2 v69.01,22.9 63.31,22.9 v60.71,25.5 55.91,30.3 54.51,30.3 R4.1 54.01,30.5 32.41,30.5 24.11,38.8 22.81,38.8 JP1.3 | v110.41,49.7 109.11,49.7 U3.11 | v108.11,39.9 108.51,40.3 108.51,41.6 R19.2 | v102.91,39.9 102.61,40.2 102.61,41.7 R17.2 | v102.11,68.5 98.71,65.1 98.71,64.3 R10.2 | v108.71,55 102.41,55 100.21,52.8 99.51,52.8 R15.2
  Bottom 1.016: 3.61,33.8 7.12,30.3 7.16,30.3 7.16,28.09 9.52,25.73 11.09,25.73 11.11,25.7
  other vias: 23.19,71.14 95.78,61.13 96.28,64.92 39.96,29.95 93.84,70.62 90.69,71.22 81.77,64.21 72.99,69.33 70.96,63.85 35.81,37.04 45.67,23.55 64.9,11.69 32.84,20 19.52,33.73 40.37,46.93 115.32,23.69 75.11,29.1 34.81,48.93
  pour Top: -9.89,88.8 -9.89,-1.2 130.11,-1.2 130.11,88.8
  pour Bottom: -19.89,98.8 -19.89,-11.2 140.11,-11.2 140.11,98.8
GND'  (via drill 0.2)
  Top 1: v66.51,42.2 73.91,42.2 74.01,42.1 86.21,42.1 U$2.GND | v63.91,39.6 63.31,39.6 60.21,42.7 51.41,42.7 v49.81,41.1 | v14.21,50.6 10.51,50.6 8.41,48.5 8.41,36.6 U$3.1B
  Bottom 1: v63.91,39.6 v66.51,42.2 | v49.81,41.1 36.11,41.1 26.61,50.6 v14.21,50.6
N1  (via drill 0.2)
  Top 0.2: v95.21,35.5 95.21,36.5 94.71,37 94.71,40.6 v95.61,41.5
  Bottom 0.2: U2.1 94.21,33.7 94.21,34.8 U2.2 94.31,34.8 94.51,34.8 v95.21,35.5 | v95.61,41.5 95.01,41.5 94.31,42.2 94.31,54.5 98.51,58.7 98.71,58.7 R11.2
N2  (via drill 0.2)
  Top 0.2: v101.61,47.2 93.31,47.2 92.21,48.3 89.01,48.3 87.61,46.9 87.61,46.4 87.41,46.2 84.51,46.2 74.91,55.8 46.21,55.8 v45.71,56.3 | v29.61,62.4 v35.71,56.3
  Bottom 0.2: U3.1 103.51,46 103.51,47.1 U3.2 103.41,47.2 v101.61,47.2 | v35.71,56.3 v45.71,56.3 | v29.61,62.4 28.31,63.7 R12.2
N3
  Bottom 0.2: U3.9 109.11,52.3 109.11,53.5 U3.8 109.01,53.6 104.81,53.6 104.21,54.2 102.81,54.2 100.61,52 100.61,48.8 98.81,47 98.81,45.8 97.51,44.5 R14.2
N4  (via drill 0.2)
  Top 0.2: v106.01,51.2 106.01,47.2 104.31,45.5 v104.31,43.5
  Bottom 0.2: U3.7 103.51,53.5 103.51,52.3 U3.6 103.61,52.3 104.91,52.3 v106.01,51.2 | v104.31,43.5 104.31,43 103.71,42.4 103.71,36.9 102.81,36 R16.2
N5
  Bottom 0.2: U3.13 109.11,47.1 109.11,46 U3.14 109.11,45.9 109.11,43.4 109.71,42.8 109.71,37.2 108.71,36.2 R18.2
N$1
  Top 0.2: U$1.1' 4.31,37.8 6.81,37.8 U$1.1
N$2
  Bottom 0.2: U2.7 99.81,34.9 99.81,36.1 U2.6
N$3
  Top 0.2: LED1.A 30.51,29.1 35.11,29.1 35.31,28.9 JP4.1 46.29,17.92 IC3.21
N$4
  Top 0.2: U$1.4' 4.31,45.4 6.81,45.4 U$1.4
N$5
  Top 0.2: U$1.5' 4.31,48 6.81,48 U$1.5
N$6
  Top 0.2: U$1.6' 4.31,50.5 6.81,50.5 U$1.6
N$7
  Top 0.2: IC3.23 62.01,15.4 43.71,15.4 35.41,23.7 JP4.3 35.31,23.7 30.51,23.7 LED3.A
N$8
  Top 0.2: IC3.24 62.01,14.2 42.31,14.2 35.41,21.1 JP4.4 35.31,21.2 30.61,21.2 LED4.A
N$9
  Top 0.2: IC3.22 62.01,16.7 44.91,16.7 35.41,26.2 JP4.2 35.31,26.3 35.11,26.5 30.61,26.5 LED2.A
N$10
  Top 0.2: IC3.25 62.01,12.9 41.11,12.9 35.41,18.6 JP4.5 35.31,18.6 30.61,18.6 LED5.A
N$11
  Top 0.2: IC3.26 62.01,11.6 39.91,11.6 35.41,16.1 JP4.6 35.31,16.1 30.61,16.1 LED6.A
N$12
  Top 0.2: IC3.27 62.01,10.3 38.61,10.3 35.41,13.5 JP4.7 35.31,13.6 30.61,13.6 LED7.A
N$13
  Top 0.2: U$1.18 19.51,75.9 19.51,78.4 U$1.18'
N$14
  Top 0.2: U$1.19 22.11,75.9 22.11,78.4 U$1.19'
N$15
  Top 0.2: IC3.28 62.01,9.1 37.31,9.1 35.41,11 JP4.8 35.31,11.1 30.61,11.1 LED8.A
N$17
  Bottom 0.2: U$4.6 16.71,67 16.71,67.5 22.31,73.1 31.51,73.1 36.01,68.6 47.41,68.6 63.11,52.9 63.11,37.9 R3.1
N$18
  Bottom 0.2: U$4.7 17.31,67 17.31,67.4 18.21,68.3 23.11,68.3 R5.2
N$19  (via drill 0.2)
  Top 0.2: v17.91,65.4 17.91,63.1 15.91,61.1 15.81,61.1 11.41,56.7 11.41,55.9 11.81,55.5 13.91,55.5 v14.11,55.7
  Bottom 0.2: v17.91,65.4 17.91,66.9 U$4.8 | v14.11,55.7 17.61,55.7 21.91,51.4 27.71,51.4 37.21,41.9 50.21,41.9 54.41,37.7 54.41,33.2 R4.2
N$20
  Top 0.2: IC3.1 71.71,9.1 97.01,9.1 99.41,11.5 JP5.1 99.51,11.6 102.01,14.1 103.31,14.1 LED9.A
N$21
  Top 0.2: IC3.2 71.71,10.3 95.71,10.3 99.41,14 JP5.2 99.51,14.1 101.61,16.2 103.31,16.2 LED10.A
N$22
  Top 0.2: IC3.3 71.71,11.6 94.41,11.6 99.41,16.6 JP5.3 99.51,16.7 101.41,18.6 103.31,18.6 LED11.A
N$23
  Top 0.2: IC3.4 71.71,12.9 93.2,12.9 JP5.4 | JP5.4 99.41,19.2 | LED12.A 103.21,21 101.31,21 99.51,19.2 JP5.4
N$24
  Top 0.2: IC3.5 71.71,14.2 92.01,14.2 99.41,21.6 JP5.5 99.51,21.7 101.41,23.6 103.21,23.6 LED13.A
N$25
  Top 0.2: IC3.6 71.71,15.4 90.61,15.4 99.41,24.2 JP5.6 99.51,24.3 101.51,26.3 103.21,26.3 LED15.A
N$26
  Top 0.2: U$1.33 57.61,75.9 57.61,78.4 U$1.33'
N$27
  Top 0.2: U$1.34 60.21,75.9 60.21,78.4 U$1.34'
N$28
  Top 0.2: IC3.7 71.71,16.7 89.41,16.7 99.41,26.7 JP5.7 99.51,26.8 101.61,28.9 103.31,28.9 LED14.A
N$29
  Top 0.2: IC3.8 71.71,17.9 75.91,17.9 76.71,17.1 87.21,17.1 99.41,29.3 JP5.8 99.51,29.4 101.51,31.4 103.31,31.4 LED16.A
N$33
  Top 0.2: U$1.40 75.41,78.4 U$1.40'
N$39
  Top 0.2: U$1.47 93.21,75.9 93.21,78.4 U$1.47'
N$40
  Top 0.2: U$1.48 95.71,75.9 95.71,78.4 U$1.48'
N$41
  Top 0.2: U$1.49 98.31,75.9 98.31,78.4 U$1.49'
N$51
  Top 0.2: U$1.64 118.61,58.1 121.11,58.1 U$1.64'
N$52
  Top 0.2: U$1.65 118.61,55.6 121.11,55.6 U$1.65'
N$53
  Top 0.2: U$1.66 118.61,53 121.11,53 U$1.66'
N$54
  Top 0.2: U$1.67 118.61,50.5 121.11,50.5 U$1.67'
N$55
  Top 0.2: U$1.68 118.61,48 121.11,48 U$1.68'
N$59
  Top 0.2: U$1.73 118.61,35.3 121.11,35.3 U$1.73'
N$60
  Top 0.2: U$1.74 118.61,32.7 121.11,32.7 U$1.74'
PB2  (via drill 0.2)
  Top 0.2: v60.91,18.8 47.81,31.9 47.81,36.8 43.11,41.5 43.11,42 U$2.PB2 | v70.51,9.2 v68.71,11
  Bottom 0.2: R20.2 109.71,65.8 109.71,67.8 111.41,69.5 113.41,69.5 113.91,69 113.91,65.2 Q1.2 114.01,65.1 114.01,64.9 116.91,62 118.91,62 119.81,61.1 119.81,60.3 120.61,59.5 121.41,59.5 122.31,58.6 122.31,34.8 121.61,34.1 120.81,34.1 119.91,33.2 119.91,32.4 100.31,12.8 99.01,12.8 95.41,9.2 v70.51,9.2 | v68.71,11 v60.91,18.8
PB4  (via drill 0.2)
  Top 0.2: v100.21,57.6 97.41,54.8 91.31,54.8 U$2.PB4
  Bottom 0.2: R10.1 101.51,64.2 101.51,58.8 R11.1 101.41,58.8 v100.21,57.6
PB6
  Top 0.2: U$2.PB6 43.01,54.7 31.41,54.7 28.61,51.9 28.61,50.7 23.21,45.3 21.41,45.3 20.31,44.2 JP3.2
PB7
  Top 0.2: U$2.PB7 43.01,52.1 30.71,52.1 22.81,44.2 JP3.3
PC7  (via drill 0.2)
  Top 0.2: IC3.20 62.11,20.4 IC3.19 62.21,20.4 62.81,21 62.91,21 63.11,21.2 63.11,38.3 v59.81,41.6 | v49.71,51.7 49.71,52.7 48.21,54.2 48.21,54.7 U$2.PC7
  Bottom 0.2: v49.71,51.7 v59.81,41.6
PD2
  Bottom 0.2: R15.1 96.71,52.7 96.71,48 97.41,47.3 R14.1
PE4
  Bottom 0.2: R19.1 111.41,41.6 111.41,36.2 R18.1
PF0  (via drill 0.2)
  Top 0.2: v114.41,62.3 114.41,63.6 112.81,65.2 112.01,65.2 111.31,64.5 v111.31,61.9 | v52.61,19.9 41.21,31.3 41.21,44.8 43.01,46.6 43.01,47 U$2.PF0
  Bottom 0.2: v114.41,62.3 114.11,62 114.11,61.4 Q2.2 114.11,61.3 114.91,60.5 114.91,58.9 114.01,58 114.01,55.1 114.51,54.6 114.51,36.3 106.31,28.1 99.01,28.1 90.81,19.9 v52.61,19.9 | v111.31,61.9 110.81,61.9 109.71,60.8 R22.2
PF1  (via drill 0.2)
  Top 0.2: v55.81,74.2 69.41,60.6 83.51,60.6 85.21,62.3 86.21,62.3 U$2.PF1 | v28.81,74.8 28.81,62.5 22.61,56.3 19.61,56.3 17.71,54.4 17.71,44.2 JP3.1
  Bottom 0.2: v55.81,74.2 31.61,74.2 31.11,74.7 28.91,74.7 v28.81,74.8
RST
  Top 0.2: IC3.18 62.01,21.8 61.81,21.8 49.51,34.1 49.51,40.2 48.61,41.1 46.91,41.1 44.51,43.5 44.51,48.2 43.11,49.6 U$2.RST
SCL  (via drill 0.2)
  Top 0.2: v18.71,63.4 v18.71,65 | 72.66,22.25 72.81,22.1 v72.81,19.2 | 72.66,22.25 72.01,22.9 71.71,22.9 IC3.12 | v53.11,19.2 47.31,19.2 28.86,37.65 | 28.86,37.65 27.71,38.8 26.61,38.8 JP6.1 | v92.01,58.3 91.31,59 91.31,59.7 U$2.PA6 | v86.81,51.1 85.61,51.1 v83.11,48.6 | v79.51,35.5 79.51,29.1 72.66,22.25 | v25.41,58.1 33.01,58.1 35.51,55.6 44.21,55.6 44.51,55.3 44.51,51.6 43.41,50.5 41.71,50.5 28.86,37.65
  Bottom 0.2: v18.71,65 18.41,64.7 16.41,64.7 16.41,64.71 15.11,64.71 14.71,65.1 14.71,66.9 U$4.3 | v18.71,63.4 23.91,58.2 R2.2 24.01,58.1 v25.41,58.1 | v72.81,19.2 61.41,19.2 61.11,19.5 53.41,19.5 v53.11,19.2 | v92.01,58.3 92.01,53.4 89.71,51.1 v86.81,51.1 | v83.11,48.6 83.11,39.1 v79.51,35.5
SDA  (via drill 0.2)
  Top 0.2: v12.71,47.2 13.11,47.2 17.71,42.6 18.11,42.6 19.11,41.6 19.11,41 19.71,40.4 v22.01,40.4 | v90.11,61.2 91.21,62.3 U$2.PA7 | v81.81,49.9 v85.21,53.3 | v77.31,35.5 v70.21,28.4 70.21,25.5 71.41,24.3 71.61,24.3 IC3.13 71.71,24.2 71.91,24.2 v72.81,23.3
  Bottom 0.2: v12.71,47.2 13.01,47.5 13.01,56.7 12.91,56.8 12.91,63.3 14.01,64.4 14.01,66.9 U$4.2 | JP7.1 26.51,41.5 25.41,40.4 v22.01,40.4 22.01,39.6 21.61,39.2 21.61,38.4 32.51,27.5 57.51,27.5 62.91,22.1 71.61,22.1 v72.81,23.3 | v70.21,28.4 68.51,28.4 64.91,32 63.21,32 R1.2 | v90.11,61.2 90.11,58.2 v85.21,53.3 | v81.81,49.9 81.81,40 v77.31,35.5

## Text on the board
tNames: 55 | 16 | 17A | 57 | 17B | PF4 | Signal | 5V | SDA | GND | SCL | 3.3V | 1 | 1A | 2A | 74 | PORTA | PORTB | Version 2.0 | Developed by ERTS Lab